# Altium PCB LedDispBoard.PcbDoc (part 1 of 2)
Units mm, origin at the board's own origin, x right, y up, seen from the top; angles counter-clockwise.
Board outline 196.96 x 52.93 mm, 2 copper layers (Top Layer, Bottom Layer); 169 components, 103 nets, 472 pads, 117 vias.
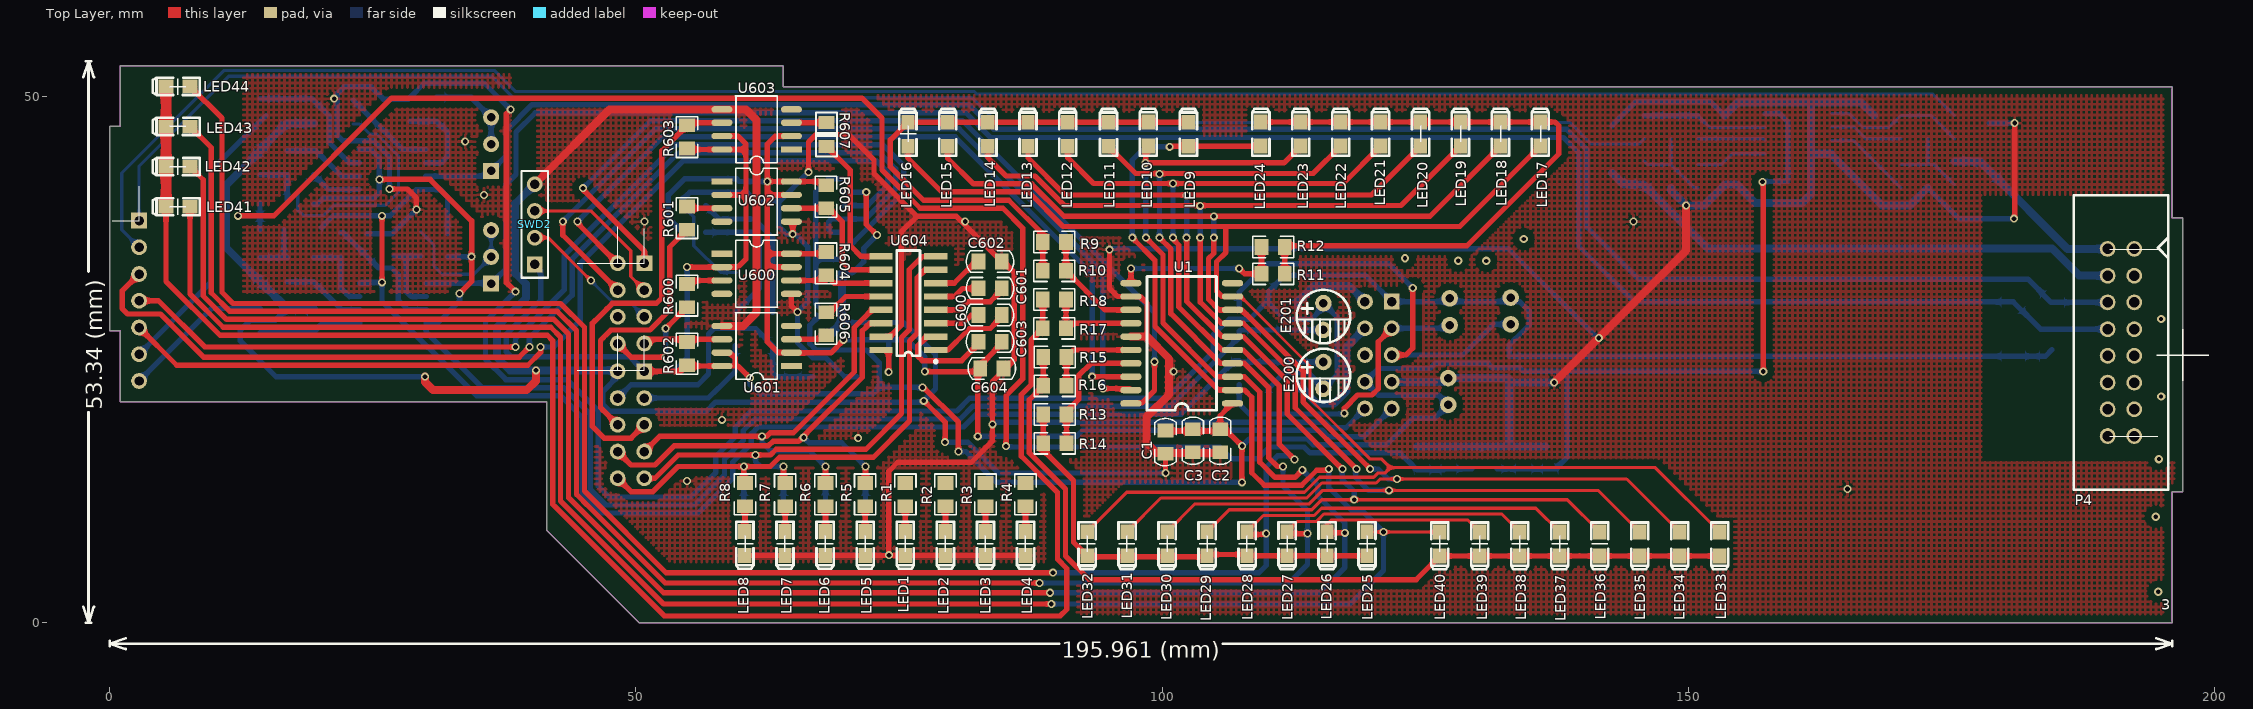
[diagram p0: Top Layer view]
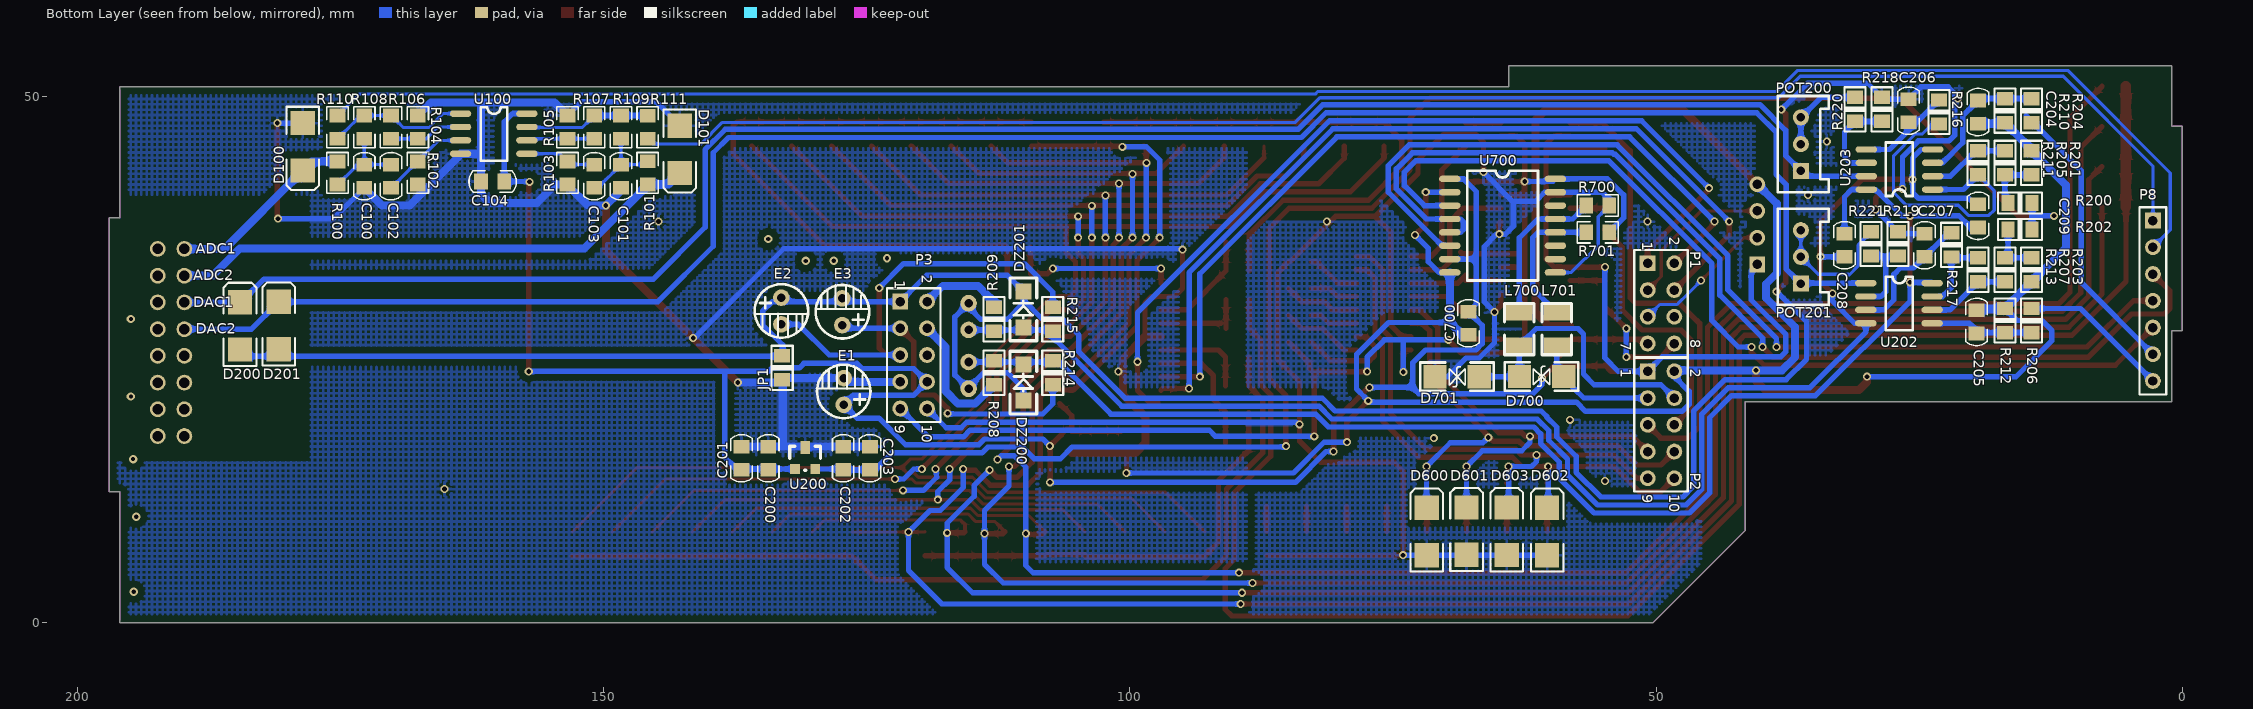
[diagram p1: Bottom Layer view, seen from below]

## Layer stack, top to bottom
Top Solder: solder mask 0.0102, Solder Resist, Dk 3.5
Top Layer: signal copper 0.0356
Dielectric 1: dielectric 0.32, FR-4, Dk 4.8
Bottom Layer: signal copper 0.0356
Bottom Solder: solder mask 0.0102, Solder Resist, Dk 3.5

## Board outline
41.529,8.763 41.529,21.006 1,21.006 1,27.754 0,27.754 0,47.154 1,47.154 1,52.927 64.008,52.927 64.008,50.927 195.961,50.927 195.961,38.454 196.961,38.454 196.961,12.454 195.961,12.454 195.961,0 50.292,0

## Design rules (kind name [scope] priority, off if disabled: settings)
Clearance Clearance_Ploygon [InPolygon] p1: gap=0.635
Clearance [All] p2: gap=0.254
PolygonConnect [All] p1: connectstyle=Relief reliefconductorwidth=0.254 reliefentries=4 polygonreliefangle="90 Angle" airgapwidth=0.254
RoutingVias [All] p1: holewidth=0.457 width=0.762 viastyle="Through Hole" minholewidth=0.457 minwidth=0.762 maxholewidth=0.711 maxwidth=1.27
SilkToSilkClearance [All] p1: silktosilkclearance=0
SilkToSolderMaskClearance [IsPad] p1: minsilkscreentomaskgap=0 clearancetoexposedcopper=TRUE
SolderMaskExpansion [All] p1: expansion=0.102
Width [All] p1: maxlimit=2.54 minlimit=0.178 preferedwidth=0.305 minimp=50.000000 maximp=50.000000 favimp=50.000000
28 further rules are at their usual default settings.

## Classes and differential pairs
component class U_Led: C1 C2 C3 LED9 LED10 LED11 LED12 LED13 LED14 LED15 LED16 LED17 LED18 LED19 LED20 LED21 LED22 LED23 LED24 LED25 LED26 LED27 LED28 LED29 LED30 LED31 LED32 LED33 LED34 LED35 LED36 LED37 LED38 LED39 LED40 LED41 LED42 LED43 LED44 R9 R10 R11 R12 R13 R14 R15 R16 R17 R18 U1
component class LedDisp: E1 E2 E3 JP1 P1 P2 P3 P4 P8 SWD2
component class Designator: C700 D700 D701 L700 L701 R700 R701 U700

## Components (designator, comment, footprint, x,y, rotation, side; value= is the part's Value field where it differs from the comment)
C1 "106" 0805/C2 100.305,17.153 r270 top locked
C2 "106" 0805/C2 105.512,17.28 r270 top locked
C3 "104" 0805/C2 102.908,17.28 r90 top locked
C100 "102" 0805/C2 172.72,42.418 r90 bottom locked
C101 "102" 0805/C2 148.336,42.418 r90 bottom locked
C102 "102" 0805/C2 170.18,42.418 r270 bottom locked
C103 "102" 0805/C2 150.876,42.418 r90 bottom locked
C104 "106" 0805/C2 160.528,41.91 r0 bottom locked
C200 "106" 0805/C2 134.341,15.621 r270 bottom locked
C201 "104" 0805/C2 136.881,15.621 r90 bottom locked
C202 "104" 0805/C2 127.229,15.621 r90 bottom locked
C203 "106" 0805/C2 124.689,15.621 r270 bottom locked
C204 "104" 0805/C2 19.406,48.514 r270 bottom locked
C205 "104" 0805/C2 19.558,28.575 r90 bottom locked
C206 "104" 0805/C2 26.01,48.641 r270 bottom locked
C207 "104" 0805/C2 24.486,35.857 r270 bottom locked
C208 "104" 0805/C2 32.106,35.857 r270 bottom locked
C209 "104" 0805/C2 19.406,38.651 r90 bottom locked
C600 "105/50V" 0805/C2 83.642,29.235 r180 top locked
C601 "105/50V" 0805/C2 83.642,31.775 r180 top locked
C602 "105/50V" 0805/C2 83.642,34.315 r180 top locked
C603 "105/50V" 0805/C2 83.642,26.695 r0 top locked
C604 "104" 0805/C2 83.812,24.155 r180 top locked
C700 "104" 0805/C2 67.818,28.448 r90 bottom locked
D100 "SMBJ3.3CA" SMB 178.562,45.212 r270 bottom locked
D101 "SMBJ3.3CA" SMB 142.748,44.958 r270 bottom locked
D200 "SMBJ15CA" SMB 184.531,28.194 r90 bottom locked
D201 "SMBJ15CA" SMB 180.848,28.23 r90 bottom locked
D600 "SMBJ15CA" SMB 71.78,8.661 r90 bottom locked
D601 "SMBJ15CA" SMB 68.007,8.698 r90 bottom locked
D602 "SMBJ15CA" SMB 60.35,8.661 r90 bottom locked
D603 "SMBJ15CA" SMB 64.179,8.68 r90 bottom locked
D700 "TED485" TED485 58.776,23.393 r0 bottom locked
D701 "TED485" TED485 66.802,23.368 r0 bottom locked
DZ200 "ZMM15" N4148 110.109,21.098 r90 bottom locked
DZ201 "ZMM15" N4148 110.109,28.051 r90 bottom locked
E1 "100uF/16V" C-10UF 127.178,23.241 r270 bottom locked
E2 "100uF/16V" C-10UF 127.305,30.81 r270 bottom locked
E3 "100uF/16V" C-10UF 133.096,28.346 r90 bottom locked
E200 "10UF/25V" C-10UF 115.316,22.225 r90 top locked
E201 "10UF/25V" C-10UF 115.316,27.813 r90 top locked
JP1 "0805" RESC_E0805_2012X50N 133.02,24.206 r90 bottom locked
L700 "4.7uH/20mA" 1210 62.992,29.464 r270 bottom locked
L701 "4.7uH/20mA" 1210 59.436,29.464 r270 bottom locked
LED1 "LED" LED0805 75.59,7.518 r270 top locked
LED2 "LED" LED0805 79.4,7.518 r270 top locked
LED3 "LED" LED0805 83.21,7.518 r270 top locked
LED4 "LED" LED0805 87.02,7.518 r270 top locked
LED5 "LED" LED0805 71.78,7.518 r270 top locked
LED6 "LED" LED0805 67.97,7.518 r270 top locked
LED7 "LED" LED0805 64.16,7.518 r270 top locked
LED8 "LED" LED0805 60.35,7.518 r270 top locked
LED9 "" LED0805 102.489,46.406 r90 top locked
LED10 "" LED0805 98.679,46.431 r90 top locked
LED11 "" LED0805 94.894,46.406 r90 top locked
LED12 "" LED0805 91.034,46.406 r90 top locked
LED13 "" LED0805 87.249,46.406 r90 top locked
LED14 "" LED0805 83.439,46.406 r90 top locked
LED15 "" LED0805 79.629,46.406 r90 top locked
LED16 "" LED0805 75.844,46.406 r90 top locked
LED17 "" LED0805 135.915,46.431 r90 top locked
LED18 "" LED0805 132.124,46.431 r90 top locked
LED19 "" LED0805 128.332,46.431 r90 top locked
LED20 "" LED0805 124.54,46.431 r90 top locked
LED21 "" LED0805 120.748,46.431 r90 top locked
LED22 "" LED0805 116.956,46.431 r90 top locked
LED23 "" LED0805 113.164,46.431 r90 top locked
LED24 "" LED0805 109.372,46.431 r90 top locked
LED25 "" LED0805 119.456,7.493 r270 top locked
LED26 "" LED0805 115.657,7.493 r270 top locked
LED27 "" LED0805 111.858,7.493 r270 top locked
LED28 "" LED0805 108.059,7.493 r270 top locked
LED29 "" LED0805 104.26,7.493 r270 top locked
LED30 "" LED0805 100.461,7.493 r270 top locked
LED31 "" LED0805 96.662,7.493 r270 top locked
LED32 "" LED0805 92.862,7.493 r270 top locked
LED33 "" LED0805 152.959,7.468 r270 top locked
LED34 "" LED0805 149.16,7.468 r270 top locked
LED35 "" LED0805 145.361,7.468 r270 top locked
LED36 "" LED0805 141.561,7.468 r270 top locked
LED37 "" LED0805 137.762,7.468 r270 top locked
LED38 "" LED0805 133.963,7.468 r270 top locked
LED39 "" LED0805 130.164,7.468 r270 top locked
LED40 "" LED0805 126.365,7.468 r270 top locked
LED41 "" LED0805 6.502,39.522 r180 top locked
LED42 "" LED0805 6.502,43.332 r180 top locked
LED43 "" LED0805 6.502,47.142 r180 top locked
LED44 "" LED0805 6.502,50.952 r180 top locked
P1 "Header 4X2" HDR2X4 50.803,34.138 r270 bottom locked
P2 "Header 5X2" HDR2X5 50.8,23.876 r270 bottom locked
P3 "Header 5X2" HDR2X5 121.802,30.505 r270 bottom locked
P4 "牛角座" "2.54* 2*8p" 192.354,35.509 r270 top locked
P8 "Header 7" HDR1X7 2.797,38.202 r270 bottom locked
POT200 "10K" RPOT-3296W 36.424,45.466 r90 bottom locked
POT201 "10K" rpOT-3296W 36.424,34.747 r90 bottom locked
R1 "2K" 0805/R2 75.59,11.074 r90 top locked
R2 "2K" 0805/R2 79.4,11.074 r90 top locked
R3 "2K" 0805/R2 83.21,11.074 r90 top locked
R4 "2K" 0805/R2 87.02,11.074 r90 top locked
R5 "2K" 0805/R2 71.78,11.074 r90 top locked
R6 "2K" 0805/R2 68.007,11.074 r90 top locked
R7 "2K" 0805/R2 64.179,11.074 r90 top locked
R8 "2K" 0805/R2 60.35,11.074 r90 top locked
R9 "20" 0805/R2 90.856,36.164 r180 top locked
R10 "20" 0805/R2 90.856,33.433 r180 top locked
R11 "20" 0805/R2 109.433,33.147 r0 top locked
R12 "20" 0805/R2 109.433,35.687 r0 top locked
R13 "20" 0805/R2 90.907,19.775 r180 top locked
R14 "20" 0805/R2 90.907,17.043 r180 top locked
R15 "20" 0805/R2 90.907,25.238 r180 top locked
R16 "20" 0805/R2 90.907,22.507 r180 top locked
R17 "20" 0805/R2 90.856,27.97 r180 top locked
R18 "20" 0805/R2 90.856,30.701 r180 top locked
R100 "1K" 0805/R2 175.26,41.622 r90 bottom locked
R101 "1K" 0805/R2 145.796,43.832 r270 bottom locked
R102 "1K" 0805/R2 167.64,41.622 r90 bottom locked
R103 "1K" 0805/R2 153.416,41.622 r90 bottom locked
R104 "1K" 0805/R2 167.64,48.184 r270 bottom locked
R105 "1K" 0805/R2 153.416,48.184 r270 bottom locked
R106 "1K" 0805/R2 170.18,48.184 r270 bottom locked
R107 "1K" 0805/R2 150.876,48.184 r270 bottom locked
R108 "1K" 0805/R2 172.72,48.184 r270 bottom locked
R109 "1K" 0805/R2 148.336,48.184 r270 bottom locked
R110 "100" 0805/R2 175.26,48.184 r270 bottom locked
R111 "100" 0805/R2 145.796,45.974 r90 bottom locked
R200 "10K" RESC_E0805_2012X50N 15.426,39.878 r180 bottom locked
R201 "10K" RESC_E0805_2012X50N 14.326,43.688 r90 bottom locked
R202 "10K" RESC_E0805_2012X50N 15.426,37.338 r180 bottom locked
R203 "10K" RESC_E0805_2012X50N 14.326,33.528 r270 bottom locked
R204 "100K" RESC_E0805_2012X50N 14.326,48.641 r90 bottom locked
R205 "100K" RESC_E0805_2012X50N 16.866,43.688 r90 bottom locked
R206 "100K" RESC_E0805_2012X50N 14.326,28.702 r270 bottom locked
R207 "100K" RESC_E0805_2012X50N 16.866,33.528 r270 bottom locked
R208 "10" RESC_E0805_2012X50N 112.903,23.749 r270 bottom locked
R209 "10" RESC_E0805_2012X50N 112.903,28.829 r90 bottom locked
R210 "100K" RESC_E0805_2012X50N 16.866,48.641 r270 bottom locked
R211 "100K" RESC_E0805_2012X50N 19.406,43.688 r270 bottom locked
R212 "100K" RESC_E0805_2012X50N 16.866,28.702 r90 bottom locked
R213 "100K" RESC_E0805_2012X50N 19.406,33.528 r90 bottom locked
R214 "0" RESC_E0805_2012X50N 107.315,23.749 r90 bottom locked
R215 "0" RESC_E0805_2012X50N 107.315,28.829 r270 bottom locked
R216 "10K" RESC_E0805_2012X50N 23.128,48.514 r90 bottom locked
R217 "10K" RESC_E0805_2012X50N 21.946,35.89 r90 bottom locked
R218 "4.7K" RESC_E0805_2012X50N 28.55,48.768 r270 bottom locked
R219 "4.7K" RESC_E0805_2012X50N 27.026,35.984 r270 bottom locked
R220 "1K" RESC_E0805_2012X50N 31.09,48.768 r90 bottom locked
R221 "1K" RESC_E0805_2012X50N 29.566,35.984 r90 bottom locked
R600 "1K" 0805/R2 54.864,29.972 r90 top locked
R601 "1K" 0805/R2 54.864,37.338 r90 top locked
R602 "10K" 0805/R2 54.864,26.67 r270 top locked
R603 "10K" 0805/R2 54.864,47.244 r270 top locked
R604 "10K" 0805/R2 68.072,33.02 r90 top locked
R605 "10K" 0805/R2 68.072,39.37 r90 top locked
R606 "1K" 0805/R2 68.072,27.305 r90 top locked
R607 "1K" RESC_E0805_2012X50N 68.107,46.38 r270 top locked
R700 "10K" 0805/R2 56.642,39.624 r180 bottom locked
R701 "10K" 0805/R2 56.642,37.084 r180 bottom locked
SWD2 "Header 4" HDR1X4 40.386,34.036 r90 top locked
U1 "TM1620" SOL-20 106.68,20.828 r180 top locked
U100 "LMV358" sO-8 163.576,48.36 r180 bottom locked
U200 "REF3012" SOT-23 131.801,14.605 r180 bottom locked
U202 "LM358" sO-8 30.074,32.258 r180 bottom locked
U203 "LM358" sO-8 23.724,41.148 r0 bottom locked
U600 "HCPL0601" HCPL0601 58.166,35.052 r0 top locked
U601 "HCPL0601" HCPL0601 64.77,24.384 r180 top locked
U602 "HCPL0601" HCPL0601 58.166,41.91 r0 top locked
U603 "HCPL0601" HCPL0601 64.77,44.958 r180 top locked
U604 "MAX3232" SO-16 78.486,25.908 r180 top locked
U700 "ADM2483" ADM2483-16 69.596,42.164 r180 bottom locked

## Footprints (in the part's own frame and the unit in brackets; to place one, negate y for a bottom-side part, rotate by r counter-clockwise, add the part's x,y. Pads: shape width x height; smd on the part's side, far side on the other; paste and mask are expansions set on the pad)
"2.54* 2*8p" [mm] "Connector; Header; 4x2 Position"
  round 1.5 hole 1: 1(0,0) 2(2.54,0) 3(5.08,0) 4(7.62,0) 5(10.16,0) 6(12.7,0) 7(15.24,0) 8(17.78,0) 9(0,-2.54) 10(2.54,-2.54) 11(5.08,-2.54) 12(7.62,-2.54) 13(10.16,-2.54) 14(12.7,-2.54) 15(15.24,-2.54) 16(17.78,-2.54)
  silkscreen extent -5.11,-5.77 22.89,3.23
0805/C2 [mm] "增加焊盘间距方便焊接"
  rect 1.3x1.5 smd: 1(-1.1,0) 2(1.1,0)
  silkscreen extent -2.25,-1.02 2.25,1.02
0805/R2 [mm]
  rect 1.3x1.5 smd: 1(0,0) 2(2.2,0)
  silkscreen extent -0.84,-1.02 3.05,1.02
1210 [mil]
  rect 60x100 smd: 1(0,0) 2(123.19,0)
  silkscreen extent -33,-55 157,55
ADM2483-16 [mil]
  oval 80x24 smd: 1(0,0) 2(0,-50) 3(0,-100) 4(0,-150) 5(0,-200) 6(0,-250) 7(0,-300) 8(0,-350) 9(395,-350) 10(395,-300) 11(395,-250) 12(395,-200) 13(395,-150) 14(395,-100) 15(395,-50) 16(395,0)
  silkscreen extent 65,-380 330,30
C-10UF [mil]
  round 62 hole 32: 1(100,0) 2(0,0)
  silkscreen extent -50,-101 150,100
HCPL0601 [mm]
  rect 2x0.6 smd: 1(0,0)
  oval 2x0.6 smd: 2(0,-1.27) 3(0,-2.54) 4(0,-3.81) 5(6.6,-3.81) 6(6.6,-2.54) 7(6.6,-1.27) 8(6.6,0)
  silkscreen extent 1.33,-5.08 5.32,1.27
HDR1X4 [mm] "Connector; Header; 4 Position"
  rect 1.5x1.5 hole 0.9: 1(0,0)
  round 1.5 hole 0.9: 2(2.54,0) 3(5.08,0) 4(7.62,0)
  silkscreen extent -1.27,-1.27 8.89,1.27
HDR1X7 [mm] "Connector; Header; 7 Position"
  rect 1.5x1.5 hole 0.9: 1(0,0)
  round 1.5 hole 0.9: 2(2.54,0) 3(5.08,0) 4(7.62,0) 5(10.16,0) 6(12.7,0) 7(15.24,0)
  silkscreen extent -1.27,-1.27 16.51,1.27
HDR2X4 [mm] "Connector; Header; 4x2 Position"
  rect 1.5x1.5 hole 0.9: 1(0,0)
  round 1.5 hole 0.9: 2(0,2.54) 3(2.54,0) 4(2.54,2.54) 5(5.08,0) 6(5.08,2.54) 7(7.62,0) 8(7.62,2.54)
  silkscreen extent -1.27,-1.27 8.89,3.81
HDR2X5 [mm] "Connector; Header; 5x2 Position"
  rect 1.5x1.5 hole 0.9: 1(0,0)
  round 1.5 hole 0.9: 2(0,2.54) 3(2.54,0) 4(2.54,2.54) 5(5.08,0) 6(5.08,2.54) 7(7.62,0) 8(7.62,2.54) 9(10.16,0) 10(10.16,2.54)
  silkscreen extent -1.27,-1.27 11.43,3.81
LED0805 [mm]
  rect 1.4x1.27 smd: 1(-1.143,0) 2(1.143,0)
  silkscreen extent -2.06,-0.81 2.4,0.81
N4148 [mil]
  rect 60x60 smd: 1(0,0) 2(135,0)
  silkscreen extent -50,-50 185,50
RESC_E0805_2012X50N [mil] "Resistor, Chip;2.00mm L X 1.20mm W X 0.50mm H"
  rect 50x60 smd: 1(-45,0) 2(45,0)
  silkscreen extent -83,-39 83,39
RPOT-3296W [mil] "立式高精度可调电阻"
  rect 60x60 hole 32 mask+4: 1(-100,-7)
  round 60 hole 32: 2(0,-7) 3(100,-7)
  silkscreen extent -180,-111 180,80
rpOT-3296W [mil] "立式高精度可调电阻"
  rect 60x60 hole 32 mask+4: 1(-100,-7)
  round 60 hole 32: 2(0,-7) 3(100,-7)
  silkscreen extent -180,-111 180,80
SMB [mm] "DO-214-AA/SMB; 2 C-Bend Leads; Body 5.3 x 3.6 mm, inc. leads (LxW)"
  rect 2.3x2.3 smd: 1(-2.25,0) 2(2.25,0)
  silkscreen extent -3.8,-1.55 4.1,1.55
sO-8 [mil]
  oval 80x24 smd: 1(0,0) 2(0,-50) 3(0,-100) 4(0,-150) 5(248.03,-150) 6(248.03,-100) 7(248.03,-50) 8(248.03,0)
  silkscreen extent 75,-176 175,24
SO-16 [mm]
  rect 2.2x0.6 smd: 1(0,0) 2(0,-1.27) 3(0,-2.54) 4(0,-3.81) 5(0,-5.08) 6(0,-6.35) 7(0,-7.62) 8(0,-8.89) 9(5.2,-8.89) 10(5.2,-7.62) 11(5.2,-6.35) 12(5.2,-5.08) 13(5.2,-3.81) 14(5.2,-2.54) 15(5.2,-1.27) 16(5.2,0)
  silkscreen extent -0.15,-9.44 3.7,1.25
SOL-20 [mil] "300MIL"
  oval 80x24 smd: 1(0,0) 2(0,-50) 3(0,-100) 4(0,-150) 5(0,-200) 6(0,-250) 7(0,-300) 8(0,-350) 9(0,-400) 10(0,-450) 11(380,-450) 12(380,-400) 13(380,-350) 14(380,-300) 15(380,-250) 16(380,-200) 17(380,-150) 18(380,-100) 19(380,-50) 20(380,0)
  silkscreen extent 60,-475 320,25
SOT-23 [mil]
  rect 36x36 smd: 1(0,0) 2(75,0)
  rect 36x50 smd: 3(38,80)
  silkscreen extent -20,-5 95,85
TED485 [mm]
  rect 2.2x2.2 smd: 1(0,0) 2(4.2,0)
  silkscreen extent -1.37,-1.35 5.59,1.35

## Part data
C1 C2 C3 C100 C101 C102 C103 C104 C200 C201 C202 C203 C204 C205 C206 C207 C208 C209 C600 C601 C602 C603 C604 C700: library part CAP, "Capacitor"
D100 D101 D200 D201 D600 D601 D602 D603: library part "D Zener", "Zener Diode"
DZ200 DZ201: library part ZENER2, "15v/0.5W"
E1 E2 E3 E200 E201: library part ELECTRO2, "Electrolytic Capacitor"
JP1: library part JUMPER, "Jumper"
L700 L701: library part FUSE
LED1 LED2 LED3 LED4 LED5 LED6 LED7 LED8 LED9 LED10 LED11 LED12 LED13 LED14 LED15 LED16 LED17 LED18 LED19 LED20 LED21 LED22 LED23 LED24 LED25 LED26 LED27 LED28 LED29 LED30 LED31 LED32 LED33 LED34 LED35 LED36 LED37 LED38 LED39 LED40 LED41 LED42 LED43 LED44: library part LED-PH
P1: "Header, 4-Pin, Dual row"
P2 P3: "Header, 5-Pin, Dual row"
P4: library part CON2*8
P8: "Header, 7-Pin"
POT200 POT201: library part RPOT2
R1 R2 R3 R4 R5 R6 R7 R8 R200 R201 R202 R203 R204 R205 R206 R207 R208 R209 R210 R211 R212 R213 R214 R215 R216 R217 R218 R219 R220 R221 R700 R701: library part RES2
R9 R10 R11 R12 R13 R14 R15 R16 R17 R18 R100 R101 R102 R103 R104 R105 R106 R107 R108 R109 R110 R111 R600 R601 R602 R603 R604 R605 R606 R607: library part RES1
SWD2: "Header, 4-Pin"
U1: "8 段×6 位～10段×4位 串行接口 共阴"
U100 U202 U203: library part 1458
U200: library part REF3020, "2.048V ,HIGH OUTPUT CURRENT: 25mA,HIGH ACCURACY: 0.2%"
U600 U601 U602 U603: library part 6N137
U700: library part RSM485CHT

## Via types
v1: diameter 0.762, hole 0.457, Top Layer to Bottom Layer, tented both sides, 106 vias
v2: diameter 0.8, hole 0.4, Top Layer to Bottom Layer, tented both sides, 9 vias
v3: diameter 0.762, hole 0.457, Top Layer to Bottom Layer, 2 vias

## Nets (pads, with @x,y where several pads share a name; then routed paths per layer and width w, separated by ;. In a path a pad name is that pad's centre, name@x,y a point inside that pad or via, vN(x,y) a via of type N, cw(c..) or ccw(c..) an arc to the next point about the centre after c; other vN are vias at no path point)
+1.25V: C202.1 C203.2 R200.2 R202.2 U200.2 | length 159.3
  Top Layer w0.508: v1(12.192,38.659) 15.621,38.659 26.797,49.835 71.476,49.835 73.381,47.93 73.381,43.002 77.012,39.37 84.861,39.37 86.741,37.49 86.741,23.165 85.166,21.59 v1(85.166,16.764)
  Bottom Layer w0.508: v1(12.192,38.659) 14.232,38.659 14.283,38.608 ; R202.2@14.283,37.338 14.283,38.608 ; R200.2@14.283,39.878 14.283,38.608 ; v1(85.166,16.764) 85.242,16.688 105.486,16.688 106.604,15.57 109.068,15.57 110.185,16.688 113.487,16.688 114.046,16.129 122.598,16.129 124.206,14.521 126.746,14.521 126.83,14.605 129.413,14.605
+9V: E2.1 P3.3 R214.1 | length 28.5
  Top Layer w0.508: v1(117.297,19.888) 117.297,20.362 118.562,21.627 119.925,21.627 120.52,22.222 120.52,26.683 P3.3@121.802,27.965
  Bottom Layer w0.508: R214.1@107.315,22.606 107.315,20.783 108.27,19.828 v1@117.237,19.828 ; P3.3@121.802,27.965 127,27.965 E2.1@127.305,28.27
+V: P3.4 R208.2 | length 12.5
  Bottom Layer w0.762: R208.2@112.903,22.606 114.706,20.803 116.307,20.803 117.5,21.996 117.5,26.203 P3.4@119.262,27.965
-9V: E3.2 P3.5 R215.1 | length 40.5
  Top Layer w0.508: P3.5@121.802,25.425 123.139,25.425 123.8,26.086 v1(123.8,31.801)
  Bottom Layer w0.508: R215.1@107.315,29.972 107.315,31.42 110.007,34.112 121.488,34.112 v1(123.8,31.801) ; P3.5@121.802,25.425 128.549,25.425 131.47,28.346 E3.2@133.096,28.346
-V: P3.2 R209.2 | length 8.1
  Bottom Layer w0.762: R209.2@112.903,29.972 112.903,30.48 114.427,32.004 117.764,32.004 P3.2@119.262,30.505
A: LED9.1 LED24.1 LED25.1 LED40.1 LED41.1 U1.2 | length 222.9
  Top Layer w0.3: LED24.1@109.347,45.263 LED24.1@109.372,45.288 ; LED25.1@119.456,8.636 119.482,8.611 v1(121.031,8.611) LED40.1@126.365,8.611
  Top Layer w0.5: LED41.1@7.645,39.522 7.645,31.217 10.795,28.067 41.902,28.067 ; 40.894,28.067 41.902,28.067 ; 43.942,10.47 43.077,11.335 ; v1(89.459,1.778) 52.634,1.778 43.077,11.335 ; v1(97.155,36.576) 99.31,34.421 99.31,28.148 105.36,22.098 U1.2@106.68,22.098 107.823,22.098 108.509,21.412 108.509,14.246 109.703,13.052 113.245,13.052 114.675,14.482 v1@115.824,14.482 ; v1(100.711,45.212) 100.762,45.263 LED9.1@102.489,45.263 LED24.1@109.347,45.263 ; 41.902,28.067 42.845,27.124 42.845,11.567 43.077,11.335
  Bottom Layer w0.5: v1(89.459,1.778) 117.856,1.778 121.031,4.953 v1(121.031,8.611) 118.974,10.668 118.001,10.668 115.824,12.845 v1(115.824,14.605) ; v1(97.155,36.576) 97.155,43.942 98.425,45.212 v1(100.711,45.212)
ADC1: P8.2 R110.1 | length 187.7
  Bottom Layer w0.305: P8.2@2.797,35.662 1.143,37.315 1.143,42.723 10.891,52.471 36.534,52.471 38.534,50.471 82.121,50.471 82.376,50.216 173.228,50.216 R110.1@175.26,48.184
ADC2: P8.1 R111.1 | length 154.6
  Bottom Layer w0.305: P8.1@2.797,38.202 2.797,43.386 11.323,51.912 36.302,51.912 38.345,49.87 81.932,49.87 84.278,47.523 138.704,47.523 140.761,45.466 145.288,45.466 R111.1@145.796,45.974
ADC_IN1: D100.2 P4.9 R100.2 | length 18
  Bottom Layer w0.762: R100.2@175.26,43.822 177.702,43.822 D100.2@178.562,42.962 186.015,35.509 P4.9@189.814,35.509
ADC_IN2: D101.2 P4.10 R101.2 | length 51.1
  Bottom Layer w0.762: D101.2@142.748,42.708 143.824,41.632 145.724,41.632 151.821,35.535 184.553,35.535 187.118,32.969 P4.10@189.814,32.969
AGND: C206.1 C207.1 D200.1 D201.1 DZ200.1 DZ201.2 E2.2 E3.1 E200.2 E201.1 JP1.2 P3.1 R218.1 R219.1 | length 269
  Top Layer w0.508: v1(26.594,41.199) 28.296,41.199 29.142,40.353 v1(29.142,39.243) ; v1(38.1,48.743) 37.694,48.336 37.694,32.309 v1(38.557,31.445)
  Bottom Layer w0.508: C207.1@24.486,36.957 26.855,36.957 R219.1@27.026,37.127 v1(29.142,39.243) ; v1(26.594,41.199) 26.594,44.258 25.081,45.771 22.174,45.771 21.641,46.304 21.641,50.286 22.257,50.902 24.849,50.902 C206.1@26.01,49.741 R218.1@28.379,49.741 ; R218.1@28.55,49.911 29.89,51.251 35.591,51.251 v1(38.1,48.743) ; v1(38.557,31.445) 35.712,28.6 35.712,25.019 37.644,23.088 43.446,23.088 46.431,20.102 46.431,12.965 47.458,11.938 55.249,11.938 57.596,14.286 57.596,15.81 59.436,17.649 59.436,18.576 60.401,19.541 60.401,19.609 60.909,20.117 80.496,20.117 81.716,21.336 100.446,21.336 104.835,25.725 104.835,27.321 106.343,28.829 108.287,28.829 110.109,30.651 ; DZ200.1@110.109,21.098 110.109,22.225 111.633,23.749 113.875,23.749 115.316,22.308 E200.2@115.316,22.225 116.611,23.52 116.611,29.058 E201.1@115.316,30.353 115.316,29.972 114.173,28.829 111.633,28.829 110.109,30.353 110.109,30.651 ; D200.1@184.531,25.944 183.901,25.314 132.969,25.314 132.969,26.391 133.629,27.051 133.633,27.051 134.874,28.292 134.874,29.591 133.96,30.505 P3.1@121.802,30.505 119.288,33.02 111.649,33.02 DZ201.2@110.109,31.48 110.109,30.651
  other v1: 35.56,40.64 33.782,45.72 21.336,49.784
B: LED10.1 LED23.1 LED26.1 LED39.1 LED42.1 U1.3 | length 231.1
  Top Layer w0.3: LED10.1@98.603,45.288 LED10.1@98.679,45.288 ; LED26.1@115.657,8.636 115.657,9.333 116.092,9.768 129.007,9.768 LED39.1@130.164,8.611
  Top Layer w0.5: LED42.1@7.645,43.332 8.898,42.08 8.898,31.03 11.107,28.821 42.215,28.821 ; 41.402,28.821 42.215,28.821 ; 45.318,10.16 43.831,11.647 ; v1(89.332,2.845) 52.633,2.845 43.831,11.647 ; v1(98.446,36.576) 100.064,34.958 100.064,28.46 105.156,23.368 U1.3@106.68,23.368 107.823,23.368 109.271,21.92 109.271,15.254 110.719,13.806 112.612,13.806 v1(113.309,14.503) ; LED10.1@98.679,45.288 98.425,45.034 v1(98.425,43.688) 111.564,43.688 LED23.1@113.164,45.288 ; LED26.1@115.657,8.636 115.754,8.539 v1(117.348,8.539) ; 42.215,28.821 43.599,27.437 43.599,11.879 43.831,11.647
  Bottom Layer w0.5: v1(89.332,2.845) 114.935,2.845 117.348,5.258 v1(117.348,8.539) 117.348,9.449 114.783,12.014 114.783,13.03 v1(113.309,14.503) ; v1@98.425,36.576 v1(98.425,43.688)
C: LED11.1 LED22.1 LED27.1 LED38.1 LED43.1 U1.4 | length 237.5
  Top Layer w0.3: LED27.1@111.858,8.636 112.85,9.628 114.663,9.628 115.357,10.322 132.252,10.322 LED38.1@133.963,8.611
  Top Layer w0.5: LED43.1@7.645,47.142 9.652,45.136 9.652,31.343 11.42,29.575 42.527,29.575 44.353,27.749 44.353,12.192 44.585,11.96 ; 45.369,11.176 44.585,11.96 ; v1(88.341,3.759) 52.785,3.759 44.585,11.96 ; LED11.1@94.894,45.263 97.485,42.672 v1@99.695,42.672 ; v1(99.737,36.576) 100.818,35.495 100.818,29.357 105.537,24.638 U1.4@106.68,24.638 107.823,24.638 110.109,22.352 110.109,15.672 110.947,14.834 v1(111.481,14.834) ; v1(99.737,42.63) v1@99.695,42.672 ; LED27.1@111.858,8.636 112.036,8.458 v1(113.792,8.458) ; LED22.1@116.956,45.288 114.34,42.672 v1@99.695,42.672
  Bottom Layer w0.5: v1(88.341,3.759) 112.014,3.759 113.792,5.537 v1(113.792,8.458) 113.792,10.668 111.481,12.979 v1(111.481,14.834) ; v1(99.737,36.576) v1(99.737,42.63)
D: LED12.1 LED21.1 LED28.1 LED37.1 LED44.1 U1.5 | length 253.4
  Top Layer w0.3: LED28.1@108.059,8.636 109.605,10.182 114.434,10.182 115.127,10.876 135.497,10.876 LED37.1@137.762,8.611
  Top Layer w0.5: LED44.1@7.645,50.952 10.668,47.93 10.668,31.393 11.732,30.329 42.839,30.329 45.107,28.061 45.107,12.504 45.339,12.272 ; 46.181,11.43 45.339,12.272 ; v1(89.611,4.75) 52.861,4.75 45.339,12.272 ; LED12.1@91.034,45.263 91.034,44.171 93.472,41.732 v1@101.041,41.732 ; v1(101.028,36.576) 101.028,36.434 101.572,35.89 101.572,30 105.664,25.908 U1.5@106.68,25.908 107.696,25.908 111.125,22.479 111.125,16.942 v1(112.573,15.494) ; v1(101.028,41.719) v1@101.041,41.732 ; v1@101.092,41.783 v1@101.041,41.732 ; LED28.1@108.059,8.636 108.313,8.382 109.728,8.382 v1@109.88,8.534 ; LED21.1@120.748,45.288 117.192,41.732 v1@101.041,41.732
  Bottom Layer w0.5: v1(89.611,4.75) 109.195,4.75 109.88,5.436 v1(109.88,8.458) 109.88,14.783 110.947,15.85 112.217,15.85 v1(112.573,15.494) ; v1(101.028,36.576) v1(101.028,41.719)
DAC1: P8.6 R204.1 | length 27.7
  Bottom Layer w0.508: P8.6@2.797,25.502 9.601,32.306 9.601,42.926 14.859,48.184
DAC2: P8.7 R206.1 | length 14.4
  Bottom Layer w0.508: P8.7@2.797,22.962 9.68,29.845 R206.1@14.326,29.845
DAC+: C208.1 C209.1 DZ200.2 E200.1 R208.1 R214.2 U202.8 U203.8 | length 137.8
  Top Layer w0.508: v1(25.883,32.334) v1(25.883,38.659)
  Bottom Layer w0.508: C209.1@20.114,37.551 21.222,38.659 v1(25.883,38.659) 26.645,38.659 29.134,41.148 U203.8@30.024,41.148 31.42,41.148 32.106,40.462 C208.1@32.106,36.957 ; U202.8@24.562,32.258 U202.8@23.774,32.258 23.85,32.334 v1(25.883,32.334) 25.883,30.531 34.85,21.564 42.814,21.564 44.907,19.471 44.907,12.334 46.827,10.414 55.88,10.414 59.182,13.716 59.182,15.24 60.96,17.018 60.96,17.945 61.608,18.593 81.128,18.593 82.347,19.812 101.803,19.812 106.883,24.892 R214.2@107.315,24.892 107.442,24.765 E200.1@115.316,24.765
DAC-: C208.2 C209.2 DZ201.1 E201.2 R209.1 R215.2 U202.4 U203.4 | length 142.7
  Top Layer w0.508: v1(25.629,42.113) 30.455,42.113 34.392,38.176 v1(34.392,34.773) 34.392,32.41 v1(33.249,31.267)
  Bottom Layer w0.508: C209.2@19.406,39.751 19.71,39.751 20.269,40.31 25.07,40.31 25.629,40.869 v1(25.629,42.113) 25.629,44.145 24.816,44.958 U203.4@23.724,44.958 ; C208.2@32.106,34.757 34.376,34.757 v1(34.392,34.773) ; v1(33.249,31.267) 33.249,30.556 31.14,28.448 U202.4@30.074,28.448 30.074,27.635 35.383,22.326 43.13,22.326 45.669,19.787 45.669,12.649 47.142,11.176 55.564,11.176 58.42,14.032 58.42,15.556 60.198,17.334 60.198,18.261 61.292,19.355 80.812,19.355 82.031,20.574 100.762,20.574 107.315,27.127 R215.2@107.315,27.686 107.442,27.813 E201.2@115.316,27.813
DAC_OUT1: D200.2 P4.11 POT200.1 U203.7 | length 176.1
  Bottom Layer w0.508: U203.7@30.024,42.418 35.738,42.418 POT200.1@36.246,42.926 37.694,44.374 37.694,46.772 40.131,49.209 81.659,49.209 84.005,46.863 138.43,46.863 140.335,44.958 140.335,37.567 145.263,32.639 182.245,32.639 184.455,30.429 P4.11@189.814,30.429
DAC_OUT2: D201.2 P4.12 POT201.1 U202.1 | length 187.3
  Bottom Layer w0.508: U202.1@30.074,32.258 36.195,32.258 POT201.1@36.246,32.207 37.643,33.604 37.643,41.631 38.608,42.596 38.608,46.609 40.446,48.447 81.343,48.447 83.689,46.101 138.114,46.101 139.573,44.642 139.573,35.763 144.856,30.48 D201.2@180.848,30.48 183.439,27.889 P4.12@189.814,27.889
DP: LED16.1 LED17.1 LED32.1 LED33.1 U1.9 | length 164
  Top Layer w0.3: LED32.1@92.862,8.636 96.625,12.398 113.516,12.398 114.937,13.82 120.086,13.82 120.473,14.206 121.14,14.206 121.666,14.732 ; U1.9@106.68,30.988 107.442,30.988 114.041,24.389 114.041,21.25 119.746,15.545 120.853,15.545 121.666,14.732 ; LED33.1@152.959,8.611 146.837,14.732 121.666,14.732
  Top Layer w0.5: LED16.1@75.844,45.263 75.844,44.12 79.029,40.935 87.285,40.935 90.586,37.635 106.002,37.635 128.262,37.635 LED17.1@135.915,45.288 ; 106.045,37.592 106.045,35.179 105.156,34.29 105.156,31.496 105.664,30.988 U1.9@106.68,30.988
E: LED13.1 LED20.1 LED29.1 LED36.1 U1.6 | length 117.7
  Top Layer w0.3: 87.249,44.171 LED13.1@87.249,45.263 ; LED29.1@104.26,8.636 106.36,10.736 114.204,10.736 115.152,11.684 v1(118.237,11.684) 138.488,11.684 LED36.1@141.561,8.611
  Top Layer w0.5: 87.249,44.171 90.78,40.64 v1@102.362,40.64 ; v1(102.32,36.576) 102.32,36.209 102.326,36.202 102.326,30.516 105.664,27.178 U1.6@106.045,27.178 ; v1(102.32,40.598) v1@102.362,40.64 ; U1.6@106.68,27.178 107.696,27.178 111.879,22.995 111.879,19.82 v1@117.094,14.605 ; LED20.1@124.54,45.288 119.892,40.64 v1@102.362,40.64
  Bottom Layer w0.5: v1(102.32,36.576) v1(102.32,40.598) ; v1@117.094,14.605 117.094,13.589 118.237,12.446 v1(118.237,11.684)
  other v1: 117.136,14.605
F: LED14.1 LED19.1 LED30.1 LED35.1 U1.7 | length 135.2
  Top Layer w0.3: LED30.1@100.461,8.636 103.115,11.29 113.975,11.29 115.257,12.573 v1(121.539,12.573) 141.398,12.573 LED35.1@145.361,8.611
  Top Layer w0.5: LED14.1@83.439,45.263 83.439,44.171 85.166,42.443 87.91,42.443 90.729,39.624 v1@103.632,39.624 ; v1(103.611,36.576) 103.611,30.451 105.614,28.448 U1.7@106.68,28.448 107.696,28.448 112.633,23.511 112.633,20.421 v1(118.449,14.605) ; v1(103.611,39.603) v1@103.632,39.624 ; LED19.1@128.332,45.288 122.667,39.624 v1@103.632,39.624
  Bottom Layer w0.5: v1(103.611,36.576) v1(103.611,39.603) ; v1@118.364,14.478 118.364,13.843 118.341,13.82 119.588,12.573 v1(121.539,12.573)
G: LED15.1 LED18.1 LED31.1 LED34.1 U1.8 | length 150.1
  Top Layer w0.3: LED31.1@96.662,8.636 99.87,11.844 113.745,11.844 115.167,13.266 120.316,13.266 120.702,13.652 v1(122.301,13.652) 144.118,13.652 LED34.1@149.16,8.611
  Top Layer w0.5: LED15.1@79.629,45.263 79.629,44.12 82.059,41.689 87.598,41.689 90.679,38.608 v1(104.902,38.608) 125.443,38.608 LED18.1@132.124,45.288 ; v1(104.902,36.576) 104.902,35.102 104.402,34.602 104.402,30.726 105.41,29.718 U1.8@106.68,29.718 107.569,29.718 113.387,23.9 113.387,20.979 v1(119.761,14.605)
  Bottom Layer w0.5: v1(104.902,36.576) v1(104.902,38.608) ; v1(119.761,14.605) 120.523,14.605 121.475,13.652 v1(122.301,13.652)
GND_COMM: C602.1 C604.1 D600.1 D601.1 D602.1 D603.1 D701.2 LED1.2 LED2.2 LED3.2 LED4.2 LED5.2 LED6.2 LED7.2 LED8.2 P3.10 R700.2 U600.5 U602.5 U604.15 U700.9 U700.15 | length 204.1
  Top Layer w0.5: LED8.2@60.35,6.375 LED7.2@64.16,6.375 LED6.2@67.97,6.375 LED5.2@71.78,6.375 LED1.2@75.59,6.375 LED2.2@79.4,6.375 LED3.2@83.21,6.375 LED4.2@87.02,6.375 ; v1(74.03,6.411) 74.03,14.391 74.879,15.24 81.864,15.24 83.871,17.247 83.871,22.911 C604.1@85.09,24.13
  Top Layer w0.508: U600.5@64.766,31.242 64.766,30.103 v1(65.354,29.515) ; U602.5@64.766,38.1 64.897,37.969 v1(64.897,36.906) ; v1(66.396,42.799) 66.396,45.669 67.107,46.38 70.18,46.38 72.619,43.942 72.619,42.686 76.697,38.608 ; U604.15@73.286,27.178 73.914,27.178 74.134,27.178 75.196,28.24 75.196,28.46 75.196,37.107 76.697,38.608 ; C602.1@84.742,34.315 80.45,38.608 76.697,38.608 ; C602.1@84.92,34.29 85.954,33.256 85.954,24.994 C604.1@85.09,24.13
  Bottom Layer w0.305: R700.2@54.442,39.624 55.498,38.568 55.498,35.815 58.039,33.274 U700.9@59.563,33.274
  Bottom Layer w0.5: R700.2@54.442,39.624 54.442,40.218 55.118,40.894 U700.15@59.563,40.894 ; D602.1@60.35,6.411 D600.1@71.78,6.411 v1(74.03,6.411)
  Bottom Layer w0.508: U700.15@59.563,40.894 60.579,40.894 61.443,40.03 63.528,40.03 63.577,39.981 ; v1(66.396,42.799) 63.577,39.981 ; D701.2@71.002,23.368 69.837,23.368 68.059,25.146 66.802,25.146 65.354,26.594 v1(65.354,29.515) 66.319,30.48 66.319,35.73 65.143,36.906 v1(64.897,36.906) 64.313,36.906 63.577,37.642 63.577,39.981 ; v1(83.871,18.847) 83.998,18.847 84.201,19.05 115.49,19.05 116.023,18.517 117.434,18.517 P3.10@119.262,20.345
  other v1: 54.864,13.462 71.12,17.526 58.166,19.272 81.28,38.1